# Altium PCB BikeLogger.PcbDoc (part 2 of 2)
Units mm, origin at the board's own origin, x right, y up, seen from the top; angles counter-clockwise.
Board outline 85 x 49 mm, 4 copper layers (Components_TopLayer, Ground Plane, Power Plane, Traces_BottomLayer), stack 1.567 mm thick; 105 components, 67 nets, 358 pads, 135 vias.
Unrouted connection lines stored in the file: 1.
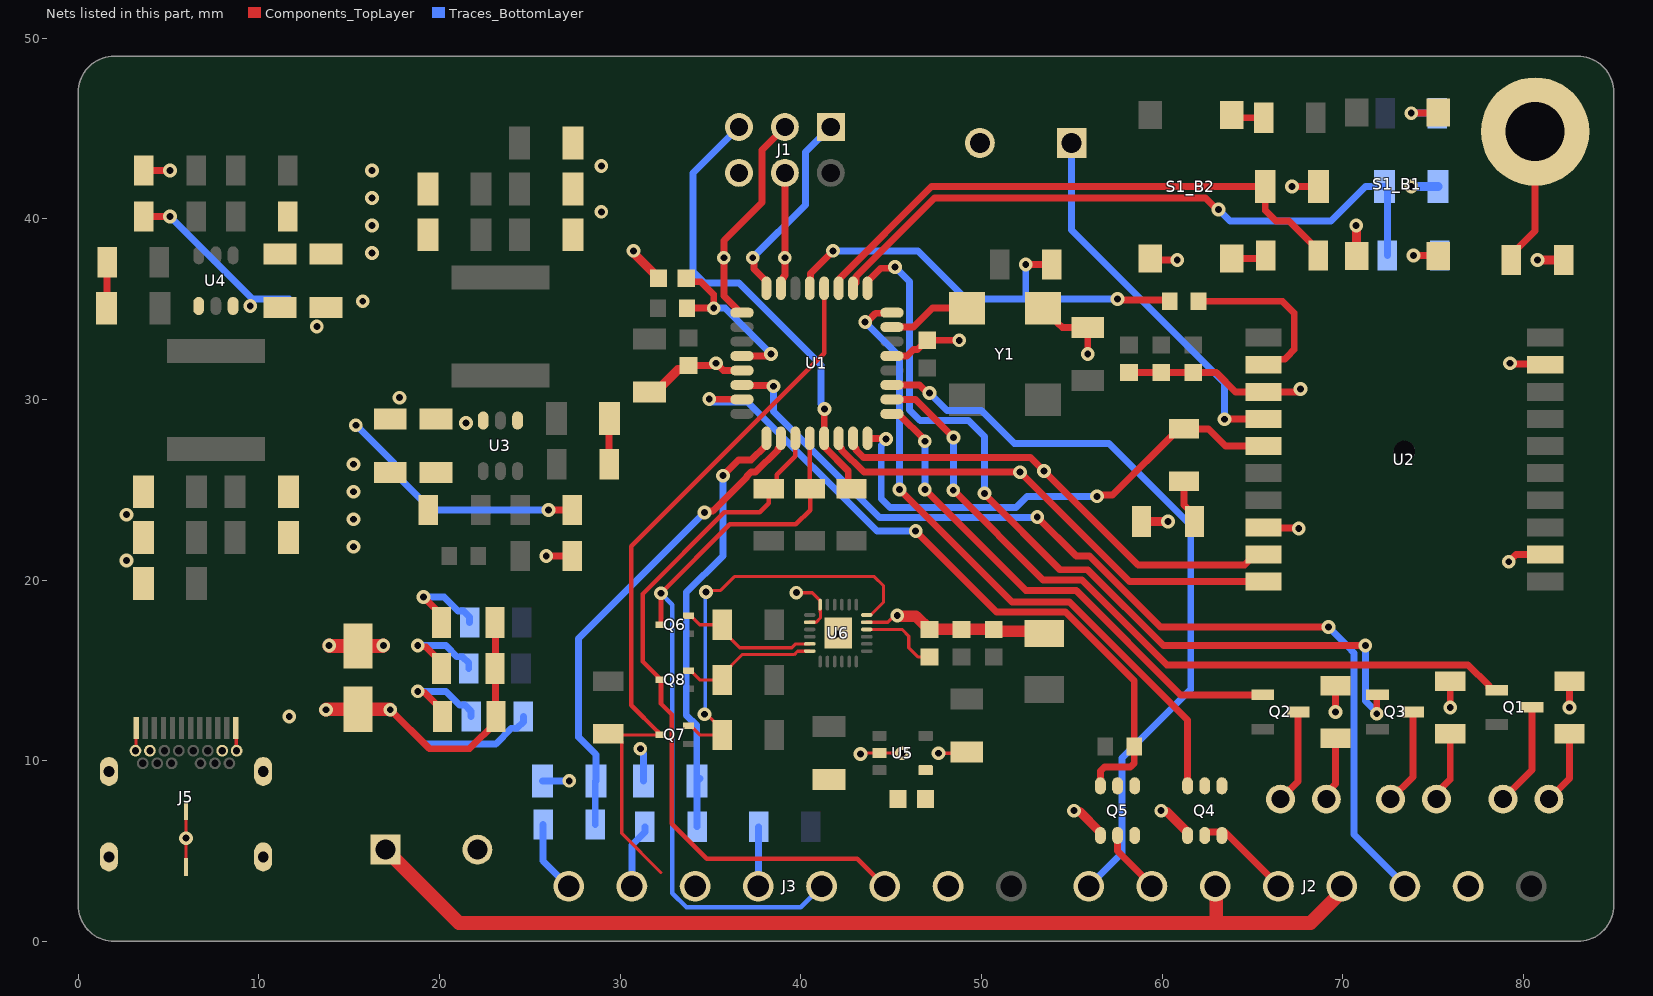
[diagram p4: the nets of this part, all layers, seen from the top]

## Via types
v1: diameter 0.762, hole 0.381, Components_TopLayer to Traces_BottomLayer, 135 vias

## Nets (pads, with @x,y where several pads share a name; then routed paths per layer and width w, separated by ;. In a path a pad name is that pad's centre, name@x,y a point inside that pad or via, vN(x,y) a via of type N, cw(c..) or ccw(c..) an arc to the next point about the centre after c; other vN are vias at no path point) (continued)
+9V: C15.2 C16.2 C21.2 C22.2 C34.2 J2.4 J2.6 J4.1 R10.2 R16.2 R23.2 U3.3 U4.3 | length 91.1
  Components_TopLayer w0.381: R16.2@3.635,40.132 v1(5.08,40.132) ; v1(26.035,23.876) R10.2@27.353,23.876
  Components_TopLayer w0.762: v1(13.89,16.381) 13.916,16.355 C34.2@15.494,16.355 16.863,16.355 v1(16.891,16.383) ; J4.1@17.018,5.08 21.082,1.016 62.865,1.016 ; J2.6@62.992,3.048 62.992,1.143 62.865,1.016 ; J2.4@69.992,3.048 69.992,2.794 68.214,1.016 62.865,1.016
  Traces_BottomLayer w0.381: v1(5.08,40.132) 9.652,35.56 11.684,35.56 ; v1(15.367,28.575) 17.499,26.443 17.499,25.935 19.558,23.876 v1(26.035,23.876) ; 19.304,10.922 23.114,10.922 23.994,11.802 24.288,11.802 24.638,12.151 R23.2@24.638,12.446
  other v1: 11.684,12.446 21.463,28.702 17.78,30.099 13.208,34.036 9.525,35.179 15.748,35.433
BIKE_EN: Q4.3 U1.8 | length 36.6
  Components_TopLayer w0.381: v1(43.561,34.29) 43.664,34.29 44.146,34.772 45.012,34.772 U1.8@45.044,34.804 ; v1(45.466,25.019) 51.689,18.796 54.876,18.796 61.407,12.265 Q4.3@61.407,8.614
  Traces_BottomLayer w0.381: v1(43.561,34.29) 45.466,32.385 v1(45.466,25.019)
Bike_RTN: J2.5 Q4.1 Q4.2 Q4.5 Q4.6 | length 5.4
  Components_TopLayer w0.381: Q4.5@62.357,6.064 63.476,6.064 J2.5@66.492,3.048
Dubug: J2.8 U1.3 | length 42.1
  Components_TopLayer w0.381: U1.3@45.044,30.804 46.563,30.804 47.014,30.353 v1(47.117,30.353)
  Traces_BottomLayer w0.381: v1(47.117,30.353) 48.082,29.388 49.987,29.388 51.816,27.559 57.067,27.559 61.582,23.043 61.582,13.952 57.785,10.155 57.785,4.897 J2.8@55.936,3.048
EXT_BAT: J6.1 U2.4 | length 21
  Components_TopLayer w0.381: v1(63.447,28.906) 63.461,28.92 U2.4@65.606,28.92
  Traces_BottomLayer w0.381: J6.1@54.991,44.196 54.991,39.37 63.447,30.914 v1(63.447,28.906)
EXT_BUTTON1: C24.2 R18.1 U1.25 | length 24.1
  Components_TopLayer w0.381: v1(35.687,25.781) 36.545,26.639 37.254,26.639 38.039,27.424 38.039,27.799 U1.25@38.094,27.854
  Traces_BottomLayer w0.381: C24.2@34.241,8.89 C24.2@34.29,8.89 ; C24.2@34.241,9.017 34.241,11.943 33.655,12.529 33.655,19.304 35.687,21.336 v1(35.687,25.781) ; R18.1@34.259,6.35 34.259,8.859 C24.2@34.29,8.89 ; C24.2@34.417,9.017 C24.2@34.29,8.89
EXT_BUTTON2: C25.2 R19.1 U1.26 | length 26.8
  Components_TopLayer w0.381: v1(34.671,23.749) 34.744,23.822 35.125,23.822 37.024,25.721 37.024,25.76 37.239,25.975 37.5,25.975 38.737,27.213 38.737,27.277 38.894,27.433 U1.26@38.894,27.854
  Traces_BottomLayer w0.381: R19.1@28.623,6.477 28.623,8.86 C25.2@28.653,8.89 28.653,10.336 27.686,11.303 27.686,16.764 v1(34.671,23.749)
FIX: R20.1 U1.32 U2.5 | length 28
  Components_TopLayer w0.381: U1.32@43.694,27.854 43.714,27.834 44.696,27.834 v1(44.717,27.813) ; v1(56.388,24.638) 56.461,24.711 57.261,24.711 60.919,28.369 R20.1@61.214,28.369 62.563,28.369 63.506,27.426 65.6,27.426 U2.5@65.606,27.42
  Traces_BottomLayer w0.381: v1(44.717,27.813) 44.717,27.71 44.45,27.443 44.45,24.511 44.933,24.028 51.918,24.028 52.527,24.638 v1(56.388,24.638)
GND: C1.1 C2.1 C3.1 C4_B1.1 C4_B2.1 C5.1 C6.1 C7.1 C8.1 C10.1 C11.1 C12.1 C13.1 C14.1 C15.1 C16.1 C18.1 C19.1 C20.1 C21.1 C22.1 C23.1 C24.1 C25.1 C26.1 C27.1 C28.1 C29.1 C30.1 C31.1 C32.1 C33.1 C34.1 D4.C D5.C D6.C D7.1 D8.C J1.6 J2.2 J3.2 J3.6 J4.2 J5.A1 J5.A12 J5.B1 J5.B12 J5.Shell J6.2 Q4.4 Q5.4 R3.2 R4.2 R5.2 R13.1 R14.1 R15.1 R22.1 R32.2 S1_B1.4 S1_B2.4 U1.5 U1.21 U2.3 U2.8 U2.12 U2.19 U3.1 U4.1 U5.2 U6.11 U6.18 U6.20 U6.25 Y1.2 | length 96.2
  Components_TopLayer w0.178: J5.B12@3.169,10.559 3.194,10.584 3.194,11.784 J5.A1@3.219,11.809 ; J5.Shell@5.969,4.129 v1(5.969,5.715) J5.Shell@5.969,7.229 ; J5.A12@8.719,11.809 8.744,11.784 8.744,10.584 J5.B1@8.769,10.559 ; v1(39.751,19.304) 40.637,19.304 41.072,18.869 41.072,18.238 41.089,18.221 41.089,17.917 40.845,17.673 40.501,17.673 U6.20@40.497,17.669 ; v1(42.037,17.018) 42.037,17.034 U6.25@42.072,17.069 ; v1(43.297,10.378) 43.348,10.429 U5.2@44.354,10.429 45.578,10.429 v1(45.593,10.414) ; U6.11@43.647,17.669 44.816,17.669 45.181,18.034 v1(45.339,18.034) ; v1(47.625,10.414) 49.12,10.414 C28.1@49.185,10.478
  Components_TopLayer w0.381: R22.1@3.635,42.672 v1(5.08,42.672) ; v1(17.272,12.827) 19.431,10.668 21.661,10.668 23.114,12.121 D4.C@23.114,12.446 ; D4.C@23.089,12.471 D6.C@23.089,17.629 ; v1(25.908,21.336) R15.1@27.353,21.336 ; C3.1@33.782,31.874 35.073,31.874 35.203,32.004 v1(35.306,32.004) 35.706,31.604 U1.21@36.744,31.604 ; U1.5@45.044,32.404 45.866,32.404 46.228,32.766 46.467,32.766 46.69,32.989 46.69,32.992 46.975,33.277 C2.1@46.99,33.277 46.992,33.275 48.767,33.275 v1(48.768,33.274) ; Y1.2@53.408,35.052 53.508,35.052 54.218,34.342 54.218,34.242 54.473,33.987 C8.1@55.88,33.987 v1(55.88,32.512) ; C5.1@58.166,31.493 C6.1@59.944,31.493 C7.1@61.722,31.493 62.995,31.493 64.068,30.42 U2.3@65.606,30.42 67.507,30.42 v1(67.659,30.572) ; S1_B2.4@59.345,37.808 59.434,37.719 v1(60.833,37.719) ; U2.8@65.606,22.92 65.636,22.89 67.534,22.89 v1(67.564,22.86) ; v1(67.183,41.783) C4_B2.1@68.658,41.783 ; v1(69.596,12.7) R4.2@69.596,14.145 ; v1(75.946,12.954) R5.2@75.946,14.399 ; v1(79.186,21.015) 79.591,21.42 U2.12@81.206,21.42 ; v1(79.248,32.004) 79.29,31.962 81.164,31.962 U2.19@81.206,31.92 ; v1(82.55,12.954) R3.2@82.55,14.399
  Components_TopLayer w0.508: v1(30.734,38.227) 30.783,38.178 30.783,38.063 32.128,36.718 C33.1@32.128,36.703 ; C1.1@31.623,30.402 31.953,30.402 33.204,31.653 33.561,31.653 C3.1@33.782,31.874 ; v1(55.118,7.239) 55.167,7.19 55.43,7.19 56.581,6.039 Q5.4@56.581,5.864 ; D8.C@58.85,23.241 v1(60.325,23.241) ; v1(59.944,7.239) 59.993,7.19 60.256,7.19 61.407,6.039 Q4.4@61.407,5.864 ; v1(70.739,39.624) 70.757,39.606 70.757,37.953 S1_B1.4@70.775,37.935 ; v1(80.772,37.719) R32.2@82.217,37.719
  Components_TopLayer w0.635: v1(45.339,18.034) 45.363,18.01 46.367,18.01 47.102,17.275 C31.1@48.895,17.275 C32.1@50.673,17.275 50.788,17.16 53.351,17.16 D7.1@53.467,17.044
  Components_TopLayer w0.762: v1(13.716,12.827) 13.744,12.855 C34.1@15.494,12.855 17.244,12.855 v1(17.272,12.827)
  Traces_BottomLayer w0.381: C25.1@25.703,8.89 v1(27.178,8.89) ; v1(31.115,10.668) 31.115,10.565 31.291,10.389 C24.1@31.291,8.89
  Traces_BottomLayer w0.508: v1(73.787,41.783) C4_B1.1@75.262,41.783
  other v1: 2.667,21.082 15.24,21.844 15.24,23.368 2.667,23.622 15.24,24.892 15.24,26.416 16.256,38.1 16.256,39.624 28.956,40.386 16.256,41.148 16.256,42.672 28.956,42.926
IMU_INT: Q7.D R28.1 U1.12 | length 41.8
  Components_TopLayer w0.178: Q7.D@32.144,11.43 R28.1@29.711,11.43 ; 32.258,3.81 30.083,5.985 30.083,11.058 R28.1@29.711,11.43 ; R28.1@29.711,11.43 29.416,11.43 R28.1@29.337,11.509 29.632,11.509 R28.1@29.711,11.43
  Components_TopLayer w0.254: Q7.D@32.258,11.43 32.144,11.43 32.093,11.481 32.093,11.595 30.607,13.081 30.607,21.872 41.294,32.559 U1.12@41.294,36.154
IMU_SCL: Q6.S R26.1 U6.23 | length 7.7
  Components_TopLayer w0.178: Q6.S@33.782,18.026 33.896,18.026 34.396,17.526 R26.1@35.639,17.526 35.639,17.231 36.614,16.256 39.497,16.256 39.71,16.469 U6.23@40.497,16.469
IMU_SDA: Q8.S R31.1 U6.24 | length 7.8
  Components_TopLayer w0.178: Q8.S@33.782,14.978 33.896,14.978 34.396,14.478 R31.1@35.639,14.478 35.639,14.773 36.741,15.875 39.624,15.875 39.814,16.065 40.493,16.065 U6.24@40.497,16.069
INP1: J3.7 R18.2 | length 3.6
  Traces_BottomLayer w0.381: J3.7@30.648,3.048 30.648,5.334 31.369,6.055 R18.2@31.369,6.35
INP2: J3.8 R19.2 | length 4
  Traces_BottomLayer w0.381: R19.2@25.733,6.477 25.733,4.463 J3.8@27.148,3.048
INT: Q7.S R29.1 U6.12 | length 23
  Components_TopLayer w0.178: Q7.S@33.782,11.93 33.896,11.93 34.396,11.43 R29.1@35.639,11.43 35.639,11.725 34.791,12.573 v1(34.671,12.573) ; v1(34.756,19.346) 34.842,19.431 35.56,19.431 36.322,20.193 44.069,20.193 44.577,19.685 44.577,18.774 43.872,18.069 U6.12@43.647,18.069
  Traces_BottomLayer w0.178: v1(34.671,12.573) 34.714,12.616 34.714,19.303 v1(34.756,19.346)
LCD_EN: Q5.3 R33.1 U1.23 | length 39.2
  Components_TopLayer w0.381: v1(34.93,30.021) 34.938,30.012 36.736,30.012 U1.23@36.744,30.004 ; v1(46.355,22.72) 50.838,18.237 54.645,18.237 58.458,14.424 R33.1@58.458,10.795 58.458,9.875 58.235,9.652 56.804,9.652 56.581,9.429 Q5.3@56.581,8.614
  Traces_BottomLayer w0.381: v1(34.93,30.021) 35.106,29.845 37.084,29.845 44.209,22.72 v1(46.355,22.72)
LCD_RTN: J2.7 Q5.1 Q5.2 Q5.5 Q5.6 | length 3.8
  Components_TopLayer w0.381: Q5.5@57.531,6.064 57.531,5.009 J2.7@59.492,3.048
Light_Sens: J2.3 U1.22 | length 55
  Components_TopLayer w0.381: U1.22@36.744,30.804 36.776,30.772 38.443,30.772 v1(38.481,30.734) ; v1(53.086,23.495) 55.245,21.336 55.979,21.336 59.916,17.399 v1(69.215,17.399)
  Traces_BottomLayer w0.381: v1(38.481,30.734) 38.481,29.337 44.348,23.47 53.061,23.47 v1(53.086,23.495) ; v1(69.215,17.399) 70.498,16.116 70.498,16.073 70.612,15.958 70.612,5.928 J2.3@73.492,3.048
NetC9_1: C9.1 R8.2 | length 2.6
  Components_TopLayer w0.381: R8.2@29.385,26.416 29.385,28.926 C9.1@29.415,28.956
NetC17_1: C17.1 R11.2 | length 2.6
  Components_TopLayer w0.381: C17.1@1.573,35.052 1.603,35.082 R11.2@1.603,37.592
NetC27_2: C27.2 U5.4
NetC30_2: C30.2 U6.10 | length 4.5
  Components_TopLayer w0.178: U6.10@43.647,17.269 45.599,17.269 45.974,16.894 45.974,16.256 46.482,15.748 47.114,15.748 C30.2@47.117,15.745
NetC33_2: C33.2 R21.1 U1.20 | length 10
  Components_TopLayer w0.381: C33.2@33.658,36.703 33.848,36.513 34.48,36.513 35.179,35.814 v1(35.179,35.052) R21.1@33.693,35.052 ; U1.20@36.744,32.404 38.143,32.404 38.251,32.512 v1(38.354,32.512)
  Traces_BottomLayer w0.381: v1(35.179,35.052) 35.814,35.052 v1(38.354,32.512)
NetD1_1: D1.1 R3.1 | length 4.1
  Components_TopLayer w0.381: D1.1@81.407,7.874 82.55,9.017 R3.1@82.55,11.509
NetD1_2: D1.2 Q1.3 | length 5.7
  Components_TopLayer w0.381: D1.2@78.867,7.874 80.482,9.489 Q1.3@80.482,12.954
NetD2_1: D2.1 R4.1 | length 3.6
  Components_TopLayer w0.381: D2.1@69.088,7.874 69.088,8.204 69.596,8.712 R4.1@69.596,11.255
NetD2_2: D2.2 Q2.3 | length 5.2
  Components_TopLayer w0.381: D2.2@66.548,7.874 67.528,8.854 Q2.3@67.528,12.7
NetD3_1: D3.1 R5.1 | length 4
  Components_TopLayer w0.381: D3.1@75.184,7.874 75.184,8.204 75.946,8.966 R5.1@75.946,11.509
NetD3_2: D3.2 Q3.3 | length 5.3
  Components_TopLayer w0.381: D3.2@72.644,7.874 73.878,9.108 Q3.3@73.878,12.7
NetD4_A: D4.A R23.1 | length 5.8
  Components_TopLayer w0.381: v1(18.796,13.843) 18.869,13.77 19.165,13.77 20.164,12.771 D4.A@20.164,12.446
  Traces_BottomLayer w0.381: v1(18.796,13.843) 20.351,13.843 21.103,13.09 21.398,13.09 21.748,12.741 R23.1@21.748,12.446
NetD5_A: D5.A R24.1 | length 5.6
  Components_TopLayer w0.381: v1(18.796,16.383) 18.869,16.31 19.243,16.31 20.115,15.438 D5.A@20.115,15.113
  Traces_BottomLayer w0.381: v1(18.796,16.383) 20.35,16.383 20.976,15.757 21.27,15.757 21.62,15.408 R24.1@21.62,15.113
NetD6_A: D6.A R25.2 | length 5.1
  Components_TopLayer w0.381: v1(19.118,19.062) 20.115,18.065 D6.A@20.115,17.653
  Traces_BottomLayer w0.381: v1(19.118,19.062) 20.26,19.062 21.024,18.297 21.319,18.297 21.669,17.948 R25.2@21.669,17.653
NetD8_A: D8.A R20.2 | length 2.5
  Components_TopLayer w0.381: R20.2@61.214,25.479 61.214,24.152 61.8,23.566 D8.A@61.8,23.241
NetH1_1: H1.1 R32.1 | length 5.8
  Components_TopLayer w0.381: R32.1@79.327,37.719 79.327,38.014 80.645,39.332 H1.1@80.645,42.926
NetJ3_5: J3.5 R17.1 | length 3.3
  Traces_BottomLayer w0.381: J3.5@37.648,3.048 37.66,3.06 37.66,6.339 R17.1@37.671,6.35
NetQ1_1: Q1.1 U1.2 | length 42
  Components_TopLayer w0.381: U1.2@45.044,30.004 46.347,30.004 v1(48.457,27.894) ; v1(48.438,24.977) 53.407,20.009 55.556,20.009 60.258,15.307 76.934,15.307 78.082,14.158 78.082,14.009 78.187,13.904 Q1.1@78.522,13.904
  Traces_BottomLayer w0.381: v1(48.438,24.977) 48.457,24.996 v1(48.457,27.894)
NetQ2_1: Q2.1 U1.1 | length 28.6
  Components_TopLayer w0.381: U1.1@45.044,29.204 45.419,29.204 46.863,27.76 v1(46.863,27.686) ; v1(46.863,25.019) 52.451,19.431 55.245,19.431 61.026,13.65 Q2.1@65.568,13.65
  Traces_BottomLayer w0.381: v1(46.863,25.019) v1(46.863,27.686)
NetQ3_1: Q3.1 U1.9 | length 48.1
  Components_TopLayer w0.381: U1.9@43.694,36.154 43.694,36.529 44.43,37.265 45.139,37.265 v1(45.212,37.338) ; v1(50.165,24.803) 50.165,24.765 54.356,20.574 55.88,20.574 60.071,16.383 v1(71.247,16.383) ; v1(71.882,12.604) 71.882,13.614 Q3.1@71.918,13.65
  Traces_BottomLayer w0.381: v1(45.212,37.338) 46.025,36.525 46.025,29.413 46.609,28.829 49.276,28.829 50.165,27.94 v1(50.165,24.803) ; v1(71.247,16.383) 71.247,13.316 71.882,12.681 v1(71.882,12.604)
NetR1_B1_1: R1_B1.1 S1_B1.1 | length 3
  Components_TopLayer w0.381: v1@73.787,45.974 73.914,45.847 75.237,45.847 S1_B1.1@75.275,45.885
  Traces_BottomLayer w0.381: v1(73.787,45.847) R1_B1.1@75.232,45.847
NetR1_B2_1: R1_B2.1 S1_B2.1 | length 1.8
  Components_TopLayer w0.381: S1_B2.1@63.845,45.758 64.01,45.593 R1_B2.1@65.611,45.593
NetR2_B1_2: R2_B1.2 S1_B1.2 | length 2.8
  Components_TopLayer w0.381: v1(73.914,37.973) 75.237,37.973 S1_B1.2@75.275,37.935
  Traces_BottomLayer w0.381: v1(73.914,37.973) R2_B1.2@75.359,37.973
NetR2_B2_2: R2_B2.2 S1_B2.2 | length 2
  Components_TopLayer w0.381: S1_B2.2@63.845,37.808 65.573,37.808 R2_B2.2@65.738,37.973
NetR34_2: R34.2 U2.2 | length 9.7
  Components_TopLayer w0.381: R34.2@62.014,35.433 66.675,35.433 67.31,34.798 67.31,32.755 66.94,32.385 66.929,32.385 66.769,32.225 65.911,32.225 U2.2@65.606,31.92
OUT1: C4_B1.2 R2_B1.1 U1.10 | length 37.1
  Components_TopLayer w0.381: U1.10@42.894,36.154 42.84,36.154 42.799,36.195 43.051,36.447 43.051,36.795 47.403,41.148 62.407,41.148 63.042,40.513 v1(63.119,40.513)
  Traces_BottomLayer w0.381: v1(63.119,40.513) 63.754,39.878 69.342,39.878 71.247,41.783 C4_B1.2@72.312,41.783 72.469,41.626 R2_B1.1@72.469,37.973
OUT2: C4_B2.2 R2_B2.1 U1.11 | length 31.7
  Components_TopLayer w0.381: U1.11@42.094,36.154 42.126,36.186 42.126,36.671 47.238,41.783 C4_B2.2@65.708,41.783 65.708,40.464 66.294,39.878 67.018,39.878 68.628,38.268 R2_B2.1@68.628,37.973
pMiso: J1.1 U1.16 | length 11
  Components_TopLayer w0.381: v1(37.338,37.846) 37.411,37.773 37.411,37.212 38.094,36.529 U1.16@38.094,36.154
  Traces_BottomLayer w0.381: v1(37.338,37.846) 40.259,40.767 40.259,43.688 J1.1@41.656,45.085
pMosi: J1.4 U1.15 | length 6.5
  Components_TopLayer w0.381: U1.15@38.894,36.154 38.894,36.575 39.051,36.731 39.051,36.795 39.116,36.861 v1(39.116,37.846) J1.4@39.116,42.545
pSCK: J1.3 U1.17 | length 12.1
  Components_TopLayer w0.381: U1.17@36.744,34.804 36.667,34.804 35.738,35.733 v1(35.738,37.846) 35.738,38.786 37.846,40.894 37.846,43.815 J1.3@39.116,45.085
RX: U1.31 U2.9 | length 26.2
  Components_TopLayer w0.381: U1.31@42.894,27.854 42.894,27.433 43.051,27.277 43.051,27.213 43.466,26.797 52.705,26.797 v1(53.467,26.035) 54.212,25.29 58.674,20.828 64.57,20.828 64.793,21.051 64.793,21.115 65.098,21.42 U2.9@65.606,21.42
SCL: J3.4 Q6.D R7.1 U1.28 | length 41.8
  Components_TopLayer w0.254: Q6.D@32.258,17.526 v1(32.258,19.276) 36.068,23.085 39.722,23.085 40.513,23.876 R7.1@40.513,25.067 40.494,25.086 U1.28@40.494,27.854
  Traces_BottomLayer w0.254: v1(32.258,19.276) 32.893,18.641 32.893,2.669 33.669,1.892 39.992,1.892 J3.4@41.148,3.048
SDA: J3.3 Q8.D R6.1 U1.27 | length 39.9
  Components_TopLayer w0.254: U1.27@39.694,27.854 39.694,26.867 38.666,25.839 38.666,25.48 38.253,25.067 R6.1@38.227,25.067 38.227,24.257 37.719,23.749 35.761,23.749 31.242,19.23 31.242,15.494 32.156,14.58 32.156,14.491 32.194,14.491 32.258,14.427 32.258,13.158 32.855,12.561 32.855,6.515 34.798,4.572 43.124,4.572 J3.3@44.648,3.048
SysCLK: U1.7 Y1.3 | length 4.6
  Components_TopLayer w0.381: U1.7@45.044,34.004 46.231,34.004 47.279,35.052 Y1.3@49.208,35.052
TX: U1.30 U2.10 | length 27.1
  Components_TopLayer w0.381: U1.30@42.094,27.854 42.094,27.433 42.251,27.277 42.251,27.213 43.488,25.975 v1(52.13,25.975) 58.185,19.92 U2.10@65.606,19.92
~GPS_RST: R30.1 R34.1 U1.13 | length 25.7
  Components_TopLayer w0.381: U1.13@40.494,36.154 40.526,36.186 40.526,36.97 v1(41.783,38.227) ; v1(52.451,37.465) R30.1@53.896,37.465 ; v1(57.531,35.56) 57.594,35.496 60.35,35.496 R34.1@60.414,35.433
  Traces_BottomLayer w0.381: v1(41.783,38.227) 46.482,38.227 49.149,35.56 52.451,35.56 ; v1(52.451,37.465) 52.451,35.56 ; v1(57.531,35.56) 52.451,35.56
~Reset: J1.5 R27.1 U1.29 | length 25.8
  Components_TopLayer w0.381: v1(41.303,29.467) 41.294,29.459 U1.29@41.294,27.854 41.326,27.822 41.326,27.337 42.625,26.039 42.625,25.241 R27.1@42.799,25.067
  Traces_BottomLayer w0.381: J1.5@36.576,45.085 34.036,42.545 34.036,37.084 34.671,36.449 36.576,36.449 41.122,31.903 41.122,29.752 41.303,29.57 v1(41.303,29.467)
pads on no net: J5.A2 J5.A3 J5.A5 J5.A6 J5.A7 J5.A8 J5.A10 J5.A11 J5.B2 J5.B3 J5.B5 J5.B6 J5.B7 J5.B8 J5.B10 J5.B11 S1_B1.3 S1_B2.3 U1.6 U1.14 U1.19 U2.6 U2.7 U2.11 U2.14 U2.15 U2.16 U2.17 U2.18 U2.20 U2.21 U6.1 U6.2 U6.3 U6.4 U6.5 U6.6 U6.7 U6.14 U6.15 U6.16 U6.17 U6.19 U6.21

## Polygon pours and split planes (outlines as drawn)
+9V on Traces_BottomLayer "NONET_L-01_P-001" (solid, pour order 27): 20.066,36.068 20.066,2.413 12.192,2.413 12.192,11.684 12.065,11.811 10.922,12.954 10.922,13.208 10.922,36.068
+9V on Traces_BottomLayer "NONET_L-01_P-001" (solid, pour order 31): 11.176,27.94 11.176,36.068 8.382,36.068 8.382,27.94
+9V on Traces_BottomLayer "NONET_L-01_P-001" (solid, pour order 30): 22.86,27.94 22.86,36.068 20.066,36.068 20.066,27.94
+1V8 on Traces_BottomLayer "NONET_L-01_P-001" (solid, pour order 21): 42.926,19.812 44.196,19.812 44.196,16.891 45.466,16.891 45.466,14.097 42.926,14.097 40.259,16.764 39.37,16.764 39.37,17.907 41.021,17.907
LCD_RTN on Components_TopLayer "NONET_L-01_P-001" (solid, pour order 29): 58.801,9.144 58.801,5.334 57.15,5.334 57.15,9.144
Bike_RTN on Components_TopLayer "NONET_L-01_P-001" (solid, pour order 28): 63.627,9.144 63.627,5.334 61.976,5.334 61.976,9.144
GND on Components_TopLayer "NONET_L-01_P-001" (solid, pour order 26): 5.334,18.288 5.334,25.146 4.572,25.908 1.524,25.908 1.524,18.288
GND on Components_TopLayer "NONET_L-01_P-001" (solid, pour order 25): 25.908,46.228 25.908,38.735 26.67,37.973 29.845,37.973 29.845,46.228
+9V on Components_TopLayer "NONET_L-01_P-001" (solid, pour order 24): 10.922,27.94 10.922,36.068 20.066,36.068 20.066,27.94
GND on Components_TopLayer "NONET_L-01_P-001" (solid, pour order 23): 12.7,43.688 20.701,43.688 20.701,38.481 18.796,36.576 12.7,36.576
GND on Components_TopLayer "NONET_L-01_P-001" (solid, pour order 22): 19.558,20.32 10.287,20.32 10.287,25.527 12.192,27.432 19.431,27.432 19.431,20.447
+1V8 on Components_TopLayer "NONET_L-01_P-001" (solid, pour order 20): 48.006,16.51 51.308,16.51 51.308,11.938 46.355,11.938 44.323,13.97 44.323,16.764 45.074,16.764 45.466,16.372 45.466,14.859 48.006,14.859
+1V8 on Components_TopLayer "NONET_L-01_P-001" (solid, pour order 16): 43.307,16.869 43.307,16.383 44.069,16.383 44.577,15.875 45.466,15.875 45.466,16.869 44.174,16.869
+3V3 on Components_TopLayer "NONET_L-01_P-001" (solid, pour order 13): 40.041,10.937 45.629,10.937 45.629,13.985 40.041,13.985
NetC27_2 on Components_TopLayer "NONET_L-01_P-001" (solid, pour order 14): 46.137,9.921 46.137,6.873 47.661,6.873 47.661,9.921
+1V8 on Components_TopLayer "NONET_L-01_P-001" (solid, pour order 12): 47.645,10.922 48.677,11.953 50.201,11.953 50.201,13.985 45.629,13.985 45.629,10.937 47.239,10.937 47.254,10.922
GND on Components_TopLayer "NONET_L-01_P-001" (solid, pour order 10): 43.597,9.921 42.073,8.397 40.041,8.397 40.041,10.937 47.661,10.937 48.169,11.445 50.201,11.445 50.201,9.921 46.137,9.921 46.137,6.873 44.613,6.873 44.613,8.905 45.121,9.413 45.121,9.921
3V3_SW on Components_TopLayer "NONET_L-01_P-001" (solid, pour order 4): 23.368,28.956 21.844,30.48 20.32,30.48 20.32,33.528 26.416,33.528 26.416,30.48 24.892,30.48
+3V3 on Components_TopLayer "NONET_L-01_P-001" (solid, pour order 5): 20.32,34.544 20.32,37.592 21.336,38.608 21.336,46.228 25.4,46.228 25.4,38.608 26.416,37.592 26.416,34.544
+9V on Components_TopLayer "NONET_L-01_P-001" (solid, pour order 6): 22.86,29.972 16.764,29.972 16.764,27.94 22.86,27.94
GND on Components_TopLayer "NONET_L-01_P-001" (solid, pour order 7): 14.732,27.432 22.86,27.432 23.876,28.448 23.876,28.956 24.892,28.956 24.892,26.924 21.336,26.924 21.336,22.352 14.732,22.352
GND on Components_TopLayer "NONET_L-01_P-001" (solid, pour order 9): 16.256,36.576 8.128,36.576 7.112,35.56 7.112,35.052 6.096,35.052 6.096,37.084 9.652,37.084 9.652,41.148 16.256,41.148
+9V on Components_TopLayer "NONET_L-01_P-001" (solid, pour order 8): 8.128,35.052 8.57,34.61 9.144,34.036 16.256,34.036 16.256,36.068 8.128,36.068
+5V on Components_TopLayer "NONET_L-01_P-001" (solid, pour order 3): 4.572,29.464 10.668,29.464 10.668,26.416 9.652,25.4 9.652,18.288 5.588,18.288 5.588,25.4 4.572,26.416
5V_SW on Components_TopLayer "NONET_L-01_P-001" (solid, pour order 2): 7.62,35.052 9.144,33.528 10.668,33.528 10.668,30.48 4.572,30.48 4.572,33.528 6.096,33.528
+3V3 on Power Plane (split plane): 83.167,48.482 83.332,48.454 83.493,48.408 83.647,48.344 83.794,48.263 83.93,48.166 84.055,48.055 84.166,47.93 84.263,47.794 84.344,47.647 84.408,47.493 84.454,47.332 84.482,47.167 84.491,47.015 84.49,47 84.49,2 84.491,1.985 84.482,1.833 84.454,1.668 84.408,1.507 84.344,1.353 84.263,1.206 84.166,1.07 84.055,0.945 83.93,0.834 83.794,0.737 83.647,0.656 83.493,0.592 83.332,0.546 83.167,0.518 83.015,0.509 83,0.51 2,0.51 1.985,0.509 1.833,0.518 1.668,0.546 1.507,0.592 1.353,0.656 1.206,0.737 1.07,0.834 0.945,0.945 0.834,1.07 0.737,1.206 0.656,1.353 0.592,1.507 0.546,1.668 0.518,1.833 0.509,1.985 0.51,2 0.51,47 0.509,47.015 0.518,47.167 0.546,47.332 0.592,47.493 0.656,47.647 0.737,47.794 0.834,47.93 0.945,48.055 1.07,48.166 1.206,48.263 1.353,48.344 1.507,48.408 1.668,48.454 1.833,48.482 1.985,48.491 2,48.49 83,48.49 83.015,48.491
GND on Ground Plane (split plane): 83.167,48.482 83.332,48.454 83.493,48.408 83.647,48.344 83.794,48.263 83.93,48.166 84.055,48.055 84.166,47.93 84.263,47.794 84.344,47.647 84.408,47.493 84.454,47.332 84.482,47.167 84.491,47.015 84.49,47 84.49,2 84.491,1.985 84.482,1.833 84.454,1.668 84.408,1.507 84.344,1.353 84.263,1.206 84.166,1.07 84.055,0.945 83.93,0.834 83.794,0.737 83.647,0.656 83.493,0.592 83.332,0.546 83.167,0.518 83.015,0.509 83,0.51 2,0.51 1.985,0.509 1.833,0.518 1.668,0.546 1.507,0.592 1.353,0.656 1.206,0.737 1.07,0.834 0.945,0.945 0.834,1.07 0.737,1.206 0.656,1.353 0.592,1.507 0.546,1.668 0.518,1.833 0.509,1.985 0.51,2 0.51,47 0.509,47.015 0.518,47.167 0.546,47.332 0.592,47.493 0.656,47.647 0.737,47.794 0.834,47.93 0.945,48.055 1.07,48.166 1.206,48.263 1.353,48.344 1.507,48.408 1.668,48.454 1.833,48.482 1.985,48.491 2,48.49 83,48.49 83.015,48.491

## Silkscreen, mask and mechanical layers (free items; w line width, h text height)
Top Overlay:
  lines w0.254: 34.671,37.719 35.306,37.084 39.497,37.084 39.878,37.465 39.878,38.1 39.37,38.608 34.798,38.608 ; 54.356,25.781 54.356,26.416 ; 54.356,26.416 53.848,26.924 53.721,26.924 53.467,26.924 51.689,26.924 51.181,26.416 51.181,25.654 51.689,25.146 51.816,25.146 53.467,25.146 53.721,25.146 53.848,25.146 54.356,25.654 54.356,26.416
  lines w0.381: 10.668,11.811 10.668,18.161
  text "BIKE LOGGER Rev1" at 3.048,46.609 h0.76
  text "Elliott Meeks 2/24" at 3.048,44.831 h0.76
  text "GND" at 48.006,38.608 h1.52
  text "3V3" at 53.086,38.608 h1.52
  text "PROG" at 31.877,37.592 h1.02
  text "TX/RX" at 54.356,25.527 h1.02
  text "FIX" at 59.309,21.209 h1.02
  text "3V3" at 24.511,17.145 h1.02
  text "1V8" at 54.864,14.986 h1.02
  text "5V" at 24.511,14.605 h1.02
  text "9V/5V/3V3 TEST POINTS" at 10.668,12.573 h1.02 r90
  text "9V" at 24.511,11.938 h1.02
  text "9V" at 15.113,9.144 h1.52
  text "GND" at 20.193,9.144 h1.52
  text "B2" at 26.649,0.572 h0.64
  text "B1" at 30.184,0.572 h0.64
  text "GND" at 33.317,0.572 h0.64
  text "3V3" at 36.746,0.572 h0.64
  text "SCL" at 40.302,0.572 h0.64
  text "SDA" at 43.858,0.572 h0.64
  text "GND" at 47.287,0.572 h0.64
  text "5V" at 51.16,0.572 h0.64
  text "LCD" at 58.59,0.572 h0.64
  text "9V" at 62.463,0.572 h0.64
  text "BIKE" at 65.31,0.572 h0.64
  text "9V" at 69.448,0.572 h0.64
  text "LS" at 73.004,0.572 h0.64
  text "GND" at 76.116,0.572 h0.64
  text "3V3" at 79.672,0.572 h0.64
  text "Debug" at 54.399,0.55 h0.64
Mechanical 1:
  the board outline again, w0.381

## Text inside footprints (layer, text, board x,y; h text height)
D1: Top Overlay "K" at 82.677,6.604 h0.76; Mechanical 15 "K" at 82.677,6.604 h0.76
D2: Top Overlay "K" at 70.358,6.604 h0.76; Mechanical 15 "K" at 70.358,6.604 h0.76
D3: Top Overlay "K" at 76.454,6.604 h0.76; Mechanical 15 "K" at 76.454,6.604 h0.76
J5: Top 3D Body "PCB Edge" at 4.269,0.279 h0.61